# Altium PCB evacc_v3_1.PcbDoc (part 4 of 5)
Units mm, origin at the board's own origin, x right, y up, seen from the top; angles counter-clockwise.
Board outline 160 x 215 mm, 2 copper layers (Top Layer, Bottom Layer), stack 1.671 mm thick; 227 components, 143 nets, 622 pads, 320 vias.
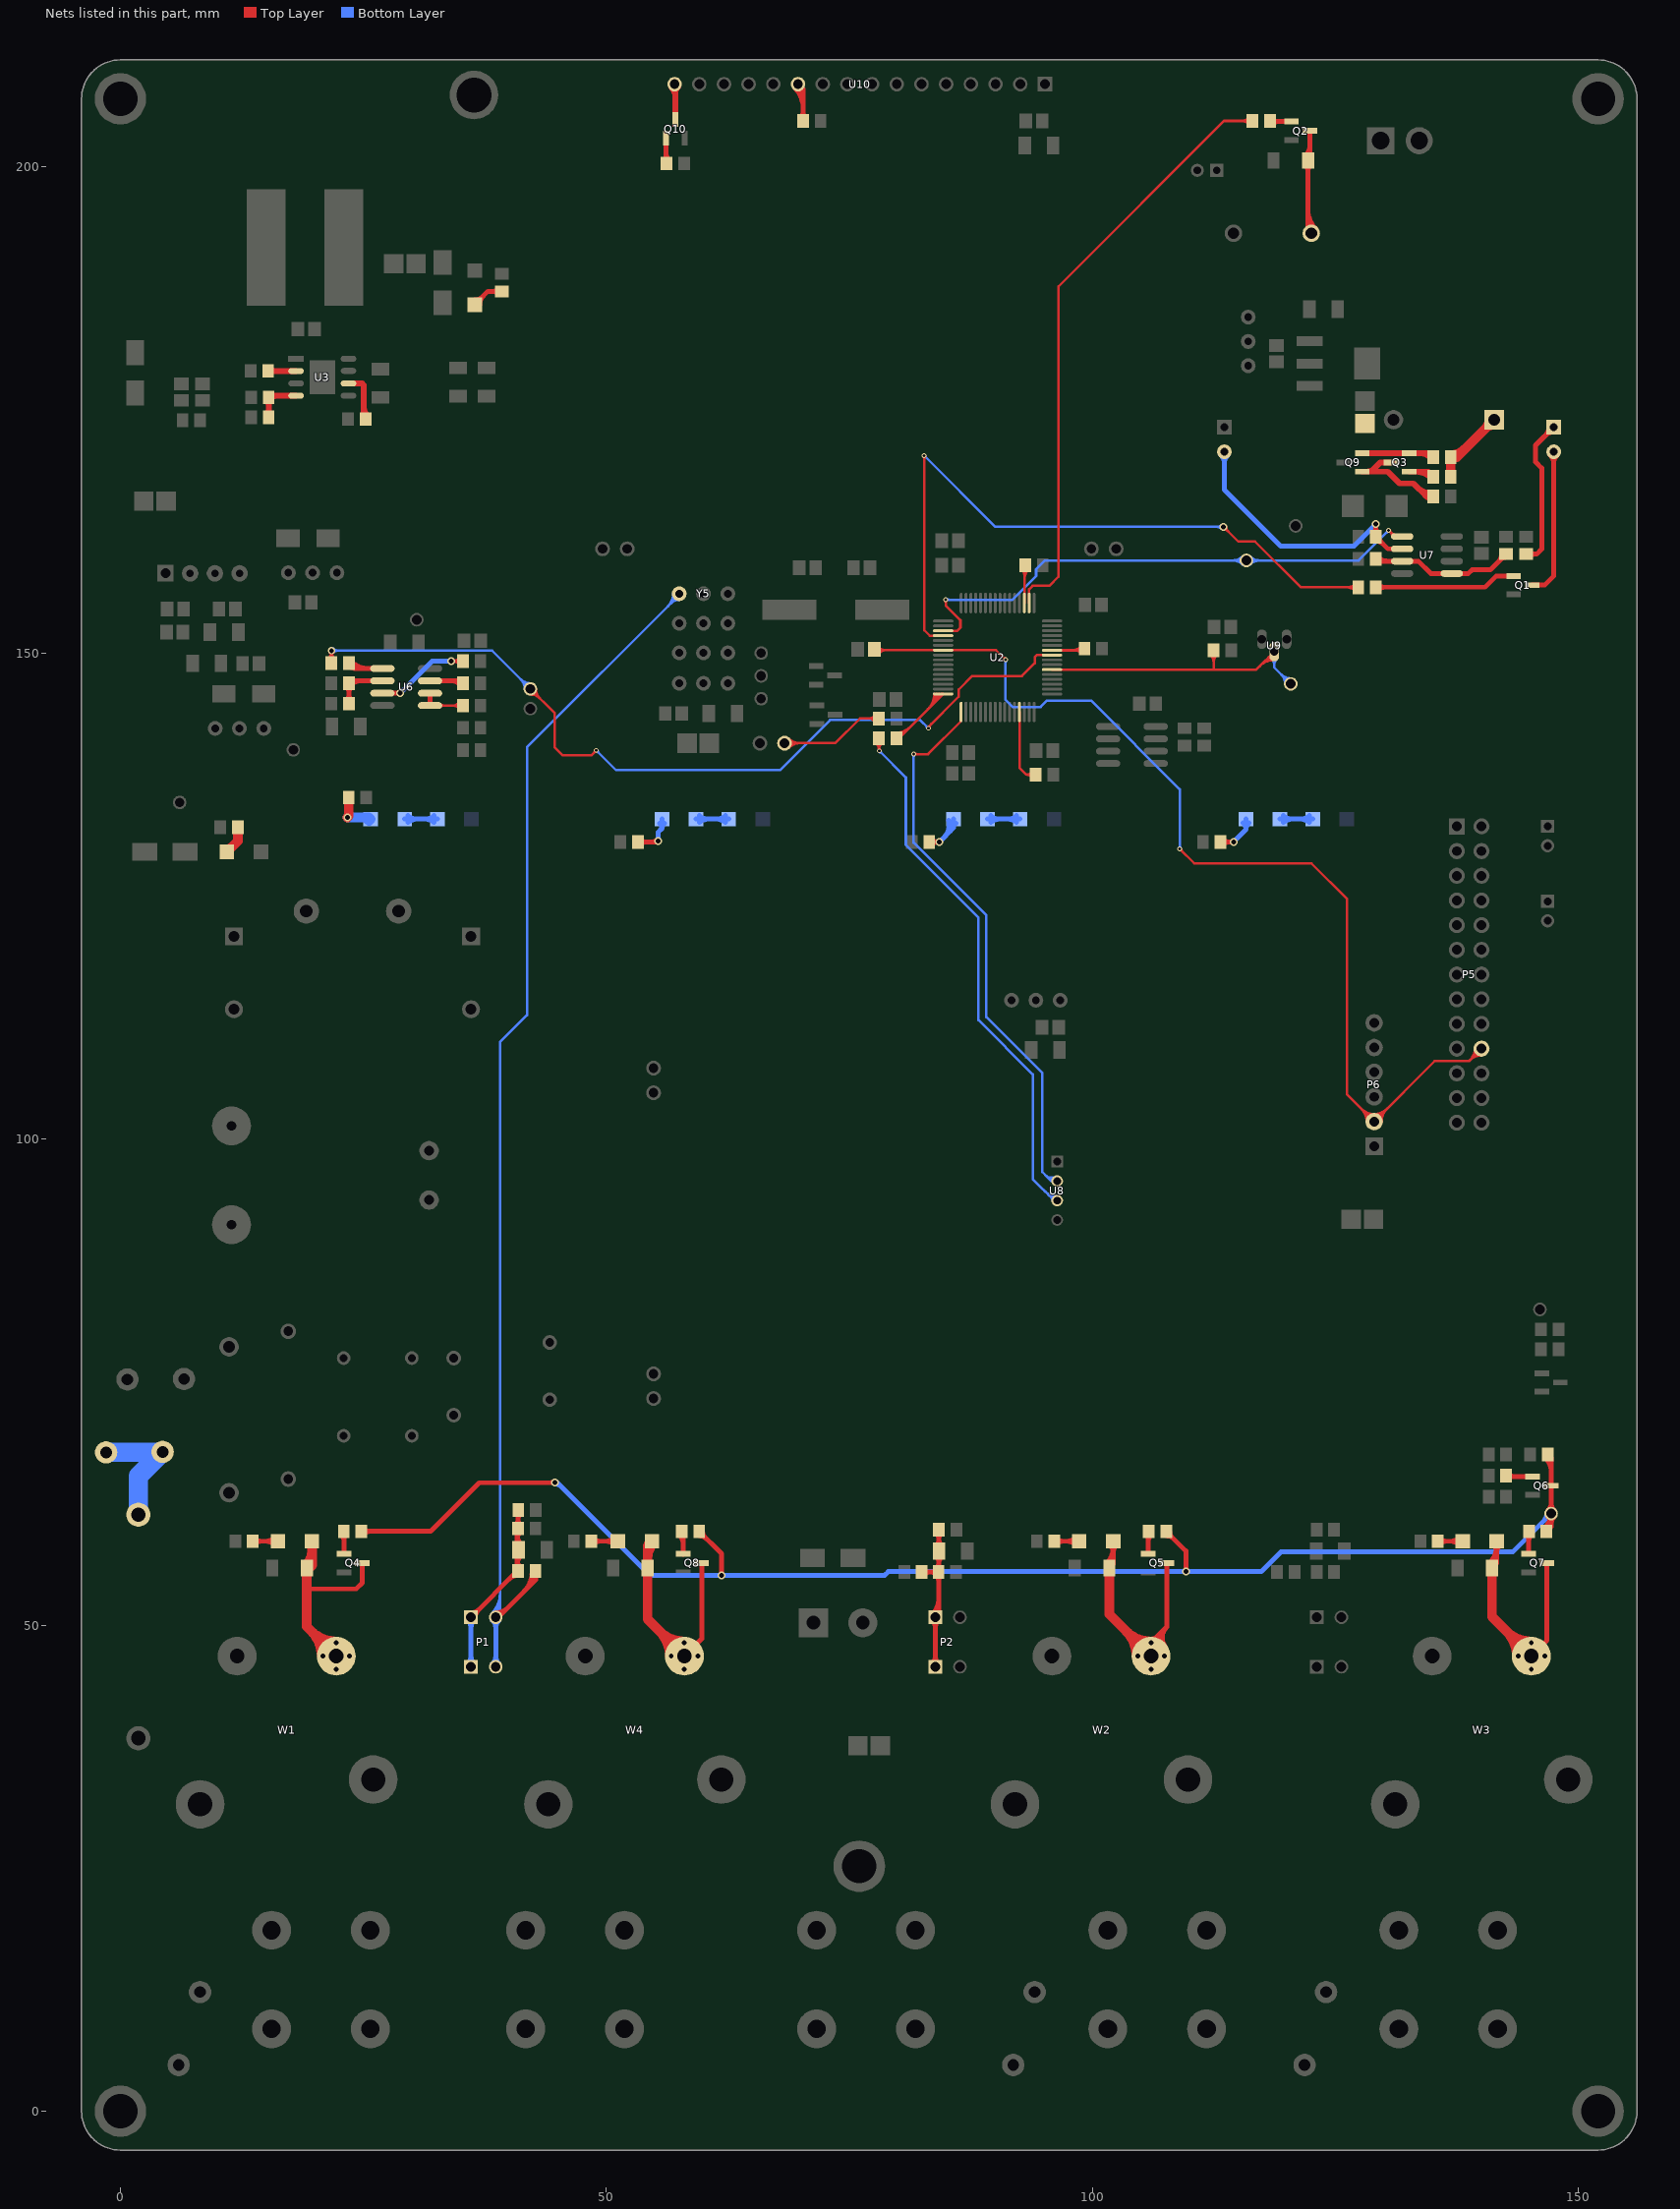
[diagram p4: the nets of this part, all layers, seen from the top]

## Via types
v1: diameter 0.8, hole 0.5, Top Layer to Bottom Layer, 150 vias
v2: diameter 0.8, hole 0.6, Top Layer to Bottom Layer, 80 vias
v3: diameter 0.5, hole 0.3, Top Layer to Bottom Layer, 53 vias
v4: diameter 1.27, hole 0.711, Top Layer to Bottom Layer, 20 vias
v5: diameter 1.2, hole 0.7, Top Layer to Bottom Layer, 13 vias
v6: diameter 1.2, hole 0.8, Top Layer to Bottom Layer, 4 vias

## Nets (pads, with @x,y where several pads share a name; then routed paths per layer and width w, separated by ;. In a path a pad name is that pad's centre, name@x,y a point inside that pad or via, vN(x,y) a via of type N, cw(c..) or ccw(c..) an arc to the next point about the centre after c; other vN are vias at no path point) (continued)
NetD6_1: D6.1 R10.1 | length 9.8
  Top Layer w0.5: D6.1@36.449,185.829 37.807,187.187 R10.1@39.243,187.187 ; 37.303,186.683 cw(c36.449,187.536) 36.449,186.329 ccw(c36.449,187.536) 37.303,186.683 ; 37.303,186.683 ccw(c38.156,185.829) 36.949,185.829 cw(c38.156,185.829) 37.303,186.683 ; 38.298,187.187 cw(c38.298,186.342) 38.896,186.94 ccw(c38.298,186.342) 38.298,187.187 ; 38.298,187.187 ccw(c38.298,188.032) 38.896,187.435 cw(c38.298,188.032) 38.298,187.187
NetD8_1: D8.1 R15.2 | length 3
  Top Layer w1: D8.1@10.95,129.54 12.076,130.666 R15.2@12.076,132.08
NetD11_1: D11.1 R34.1 | length 21.9
  Top Layer w0.5: R34.1@144.602,160.164 145.686,160.164 146.202,160.68 146.202,169.012 145.567,169.647 145.567,171.348 D11.1@147.447,173.228 ; 145.547,160.164 cw(c145.547,161.009) 144.95,160.411 ccw(c145.547,161.009) 145.547,160.164 ; 145.547,160.164 ccw(c145.547,159.319) 144.95,159.916 cw(c145.547,159.319) 145.547,160.164 ; 146.593,172.374 cw(c147.447,171.521) 147.447,172.728 ccw(c147.447,171.521) 146.593,172.374 ; 146.593,172.374 ccw(c145.74,173.228) 146.947,173.228 cw(c145.74,173.228) 146.593,172.374
NetD11_2: D11.2 Q1.3 | length 19.2
  Top Layer w0.5: Q1.3@145.222,156.972 146.507,156.972 147.447,157.912 D11.2@147.447,170.688 ; 147.447,169.481 cw(c148.654,169.481) 147.801,170.334 ccw(c148.654,169.481) 147.447,169.481 ; 147.447,169.481 ccw(c146.24,169.481) 147.093,170.334 cw(c146.24,169.481) 147.447,169.481
NetD12_2: D12.2 R35.1 U7.2 | length 37.1
  Top Layer w0.5: v1(129.134,163.246) 129.134,161.961 R35.1@129.145,161.95 130.387,160.708 U7.2@131.855,160.708 ; R35.1@128.897,162.298 ccw(c128.326,162.869) 129.134,162.869 cw(c128.326,162.869) R35.1@128.897,162.298 ; v1@129.134,162.922 ccw(c130.016,162.922) 129.392,162.298 cw(c130.016,162.922) v1@129.134,162.922 ; R35.1@129.145,161.5 cw(c129.145,160.414) 129.913,161.182 ccw(c129.145,160.414) R35.1@129.145,161.5 ; R35.1@129.495,161.85 ccw(c130.098,161.85) 129.671,161.424 cw(c130.098,161.85) R35.1@129.495,161.85
  Bottom Layer w0.5: D12.2@113.563,170.688 113.563,166.776 119.355,160.985 126.898,160.985 129.134,163.22 v1(129.134,163.246) ; 113.563,169.481 cw(c114.771,169.481) 113.917,170.334 ccw(c114.771,169.481) 113.563,169.481 ; 113.563,169.481 ccw(c112.356,169.481) 113.21,170.334 cw(c112.356,169.481) 113.563,169.481 ; 128.86,162.946 ccw(c128.56,163.246) 128.984,163.246 cw(c128.56,163.246) 128.86,162.946
NetD13_1: D13.1 DS1.2 Q2.3 | length 17.9
  Top Layer w0.5: D13.1@121.906,200.17 cw(c121.266,199.53) 122.171,199.53 cw(c123.076,199.53) D13.1@122.436,200.17 ; 122.171,194.328 ccw(c123.663,194.328) DS1.2@122.608,193.273 ; 122.171,195.535 ccw(c124.87,195.535) DS1.2@122.962,193.627 ; Q2.3@122.362,203.708 122.362,200.851 D13.1@122.171,200.66 122.171,193.498 DS1.2@122.502,193.167 ; D13.1@121.906,201.15 ccw(c120.805,202.251) 122.362,202.251 cw(c120.805,202.251) D13.1@121.906,201.15
NetD14_1: D14.1 D15.2 | length 10.9
  Bottom Layer w0.5: D15.2@119.289,132.906 D14.1@122.647,132.906 ; 120.496,132.906 cw(c120.496,134.113) 119.643,133.26 ccw(c120.496,134.113) 120.496,132.906 ; 120.496,132.906 ccw(c120.496,131.699) 119.643,132.552 cw(c120.496,131.699) 120.496,132.906 ; 121.44,132.906 cw(c121.44,131.699) 122.293,132.552 ccw(c121.44,131.699) 121.44,132.906 ; 121.44,132.906 ccw(c121.44,134.113) 122.293,133.26 cw(c121.44,134.113) 121.44,132.906
NetD15_1: D15.1 R41.2 | length 10
  Top Layer w0.5: R41.2@113.168,130.556 v1(114.503,130.556) ; 114.013,130.556 cw(c114.013,131.401) 113.416,130.803 ccw(c114.013,131.401) 114.013,130.556 ; 114.013,130.556 ccw(c114.013,129.711) 113.416,130.309 cw(c114.013,129.711) 114.013,130.556
  Bottom Layer w0.5: v1(114.503,130.556) 115.789,131.842 ; D15.1@115.789,132.906 115.789,131.842 ; 115.789,131.842 cw(c116.671,131.842) 116.108,132.521 ccw(c116.671,131.842) 115.789,131.842 ; 115.789,131.842 ccw(c114.907,131.842) 115.47,132.521 cw(c114.907,131.842) 115.789,131.842
NetD16_1: D16.1 D17.2 | length 10.9
  Bottom Layer w0.5: D17.2@89.19,132.906 D16.1@92.548,132.906 ; 90.397,132.906 cw(c90.397,134.113) 89.544,133.26 ccw(c90.397,134.113) 90.397,132.906 ; 90.397,132.906 ccw(c90.397,131.699) 89.544,132.552 cw(c90.397,131.699) 90.397,132.906 ; 91.341,132.906 cw(c91.341,131.699) 92.194,132.552 ccw(c91.341,131.699) 91.341,132.906 ; 91.341,132.906 ccw(c91.341,134.113) 92.194,133.26 cw(c91.341,134.113) 91.341,132.906
NetD17_1: D17.1 R42.2 | length 15.6
  Top Layer w0.5: R42.2@83.196,130.556 v1(84.252,130.556) ; v1@84.041,130.556 cw(c84.041,131.401) 83.444,130.803 ccw(c84.041,131.401) v1@84.041,130.556 ; v1@84.041,130.556 ccw(c84.041,129.711) 83.444,130.309 cw(c84.041,129.711) v1@84.041,130.556
  Bottom Layer w0.5: v1(84.252,130.556) 85.69,131.994 ; 85.69,131.994 cw(c86.271,131.994) 85.959,132.484 ccw(c86.271,131.994) 85.69,131.994 ; 85.69,131.994 ccw(c85.109,131.994) 85.421,132.484 cw(c85.109,131.994) 85.69,131.994 ; 85.69,131.994 D17.1@85.69,132.906 ; D17.1@85.69,132.906 cw(c84.388,132.588) 85.336,131.64 ccw(c84.388,132.588) D17.1@85.69,132.906 ; 84.708,131.012 ccw(c83.379,132.341) 85.204,132.787 cw(c83.379,132.341) 84.708,131.012
NetD18_1: D18.1 D19.2 | length 10.9
  Bottom Layer w0.5: D19.2@59.218,132.906 D18.1@62.576,132.906 ; 60.425,132.906 cw(c60.425,134.113) 59.572,133.26 ccw(c60.425,134.113) 60.425,132.906 ; 60.425,132.906 ccw(c60.425,131.699) 59.572,132.552 cw(c60.425,131.699) 60.425,132.906 ; 61.369,132.906 cw(c61.369,131.699) 62.222,132.552 ccw(c61.369,131.699) 61.369,132.906 ; 61.369,132.906 ccw(c61.369,134.113) 62.222,133.26 cw(c61.369,134.113) 61.369,132.906
NetD19_1: D19.1 R43.2 | length 10.8
  Top Layer w0.5: R43.2@53.224,130.556 55.194,130.556 v1(55.296,130.658) ; 54.069,130.556 cw(c54.069,131.401) 53.472,130.803 ccw(c54.069,131.401) 54.069,130.556 ; 54.069,130.556 ccw(c54.069,129.711) 53.472,130.309 cw(c54.069,129.711) 54.069,130.556 ; 54.688,130.556 ccw(c54.688,131.265) 55.19,130.764 cw(c54.688,131.265) 54.688,130.556
  Bottom Layer w0.5: v1(55.296,130.658) 55.296,131.547 55.718,131.969 ; D19.1@55.718,132.906 55.718,131.969 ; 55.718,131.969 cw(c56.346,131.969) 55.996,132.491 ccw(c56.346,131.969) 55.718,131.969 ; 55.718,131.969 ccw(c55.09,131.969) 55.44,132.491 cw(c55.09,131.969) 55.718,131.969
NetD20_1: D20.1 D21.2 | length 10.9
  Bottom Layer w0.5: D21.2@29.246,132.906 D20.1@32.604,132.906 ; 30.453,132.906 cw(c30.453,134.113) 29.6,133.26 ccw(c30.453,134.113) 30.453,132.906 ; 30.453,132.906 ccw(c30.453,131.699) 29.6,132.552 cw(c30.453,131.699) 30.453,132.906 ; 31.397,132.906 cw(c31.397,131.699) 32.25,132.552 ccw(c31.397,131.699) 31.397,132.906 ; 31.397,132.906 ccw(c31.397,134.113) 32.25,133.26 cw(c31.397,134.113) 31.397,132.906
NetD21_1: D21.1 R44.2 | length 6.5
  Top Layer w1: v1(23.368,133.096) 23.484,133.212 R44.2@23.484,135.128
  Bottom Layer w1: v1(23.368,133.096) 25.556,133.096 D21.1@25.746,132.906 ; 24.684,133.096 cw(c24.684,131.844) 25.569,132.729 ccw(c24.684,131.844) 24.684,133.096
NetD23_1: D23.1 D25.2 Q4.3 W1.2 | length 57.4
  Top Layer w0.254: D23.1@19.174,55.88 19.174,56.999 ; D25.2@19.701,58.371 D25.2@19.701,58.625 19.701,57.526 ; v1(22.202,45.453) W1.2@22.202,46.814 v1(22.202,48.196) ; 19.174,56.999 cw(c18.62,56.999) 18.912,56.528 ccw(c18.62,56.999) 19.174,56.999 ; 19.174,56.999 ccw(c19.728,56.999) 19.436,56.528 cw(c19.728,56.999) 19.174,56.999 ; 19.174,56.999 19.701,57.526 ; 19.701,57.527 cw(c20.358,57.527) 20.021,58.09 ccw(c20.358,57.527) 19.701,57.527 ; 19.701,57.527 ccw(c19.044,57.527) 19.381,58.09 cw(c19.044,57.527) 19.701,57.527 ; W1.2@22.202,46.112 cw(c21.543,46.112) 22.009,45.646 ccw(c21.543,46.112) W1.2@22.202,46.112 ; W1.2@22.202,46.112 ccw(c22.861,46.112) 22.395,45.646 cw(c22.861,46.112) W1.2@22.202,46.112 ; W1.2@22.202,47.537 cw(c22.861,47.537) 22.395,48.003 ccw(c22.861,47.537) W1.2@22.202,47.537 ; W1.2@22.202,47.537 ccw(c21.543,47.537) 22.009,48.003 cw(c21.543,47.537) W1.2@22.202,47.537
  Top Layer w0.5: 19.174,53.848 19.301,53.721 24.257,53.721 24.892,54.356 Q4.3@24.892,56.388
  Top Layer w1: D25.2@19.701,58.371 19.701,57.526 ; W1.2@22.202,46.814 21.522,47.494 21.511,47.505 19.174,49.842 19.174,53.848 19.174,55.626 19.301,55.753 19.701,56.153 19.701,57.526 ; 19.641,49.375 cw(c17.081,46.814) 20.702,46.814 ccw(c17.081,46.814) 19.641,49.375 ; 19.641,49.375 ccw(c22.202,51.935) 22.202,48.314 cw(c22.202,51.935) 19.641,49.375 ; 19.701,57.526 cw(c17.951,57.526) 19.092,56.2 ccw(c17.951,57.526) 19.701,57.526
  Bottom Layer w0.254: v1(20.841,46.814) W1.2@22.202,46.814 v1(23.584,46.814) ; W1.2@21.5,46.814 cw(c21.5,47.473) 21.034,47.007 ccw(c21.5,47.473) W1.2@21.5,46.814 ; W1.2@21.5,46.814 ccw(c21.5,46.155) 21.034,46.621 cw(c21.5,46.155) W1.2@21.5,46.814 ; W1.2@22.925,46.814 cw(c22.925,46.155) 23.391,46.621 ccw(c22.925,46.155) W1.2@22.925,46.814 ; W1.2@22.925,46.814 ccw(c22.925,47.473) 23.391,47.007 cw(c22.925,47.473) W1.2@22.925,46.814
NetD24_1: D24.1 D26.2 Q5.3 W2.2 | length 68.2
  Top Layer w0.254: v1(106.022,45.453) W2.2@106.022,46.814 ; W2.2@106.022,46.112 cw(c105.363,46.112) 105.829,45.646 ccw(c105.363,46.112) W2.2@106.022,46.112 ; W2.2@106.022,46.112 ccw(c106.681,46.112) 106.215,45.646 cw(c106.681,46.112) W2.2@106.022,46.112
  Top Layer w0.5: D24.1@101.724,55.88 102.124,56.28 D26.2@102.124,58.625 ; W2.2@106.022,46.814 v1(106.022,48.196) 107.63,49.804 ; Q5.3@107.63,56.388 107.63,49.804 ; 102.124,57.418 cw(c103.331,57.418) 102.478,58.271 ccw(c103.331,57.418) 102.124,57.418 ; 102.124,57.418 ccw(c100.917,57.418) 101.771,58.271 cw(c100.917,57.418) 102.124,57.418 ; 107.63,49.804 ccw(c108.727,48.707) 107.456,47.817 cw(c108.727,48.707) 107.63,49.804 ; D24.1@101.459,56.37 ccw(c99.853,57.976) 102.124,57.976 cw(c99.853,57.976) D24.1@101.459,56.37 ; D24.1@101.812,56.017 ccw(c101.06,56.769) 102.124,56.769 cw(c101.06,56.769) D24.1@101.812,56.017 ; W2.2@106.022,48.564 ccw(c106.022,49.451) 106.649,48.824 cw(c106.022,49.451) W2.2@106.022,48.564 ; W2.2@106.636,47.244 cw(c107.735,48.013) 106.787,48.961 ccw(c107.735,48.013) W2.2@106.636,47.244 ; W2.2@107.046,47.531 cw(c108.231,48.36) 107.208,49.383 ccw(c108.231,48.36) W2.2@107.046,47.531
  Top Layer w1: D24.1@101.724,55.88 101.724,51.112 105.331,47.505 105.342,47.494 W2.2@106.022,46.814 ; 103.461,49.375 cw(c100.901,46.814) 104.522,46.814 ccw(c100.901,46.814) 103.461,49.375 ; 103.461,49.375 ccw(c106.022,51.935) 106.022,48.314 cw(c106.022,51.935) 103.461,49.375
  Bottom Layer w0.254: v1(104.661,46.814) W2.2@106.022,46.814 v1(107.404,46.814) ; W2.2@105.32,46.814 cw(c105.32,47.473) 104.854,47.007 ccw(c105.32,47.473) W2.2@105.32,46.814 ; W2.2@105.32,46.814 ccw(c105.32,46.155) 104.854,46.621 cw(c105.32,46.155) W2.2@105.32,46.814 ; W2.2@106.745,46.814 cw(c106.745,46.155) 107.211,46.621 ccw(c106.745,46.155) W2.2@106.745,46.814 ; W2.2@106.745,46.814 ccw(c106.745,47.473) 107.211,47.007 cw(c106.745,47.473) W2.2@106.745,46.814
NetD25_1: D25.1 R47.1 | length 9
  Top Layer w0.5: R47.1@13.619,58.625 D25.1@16.201,58.625 ; 14.464,58.625 cw(c14.464,59.47) 13.866,58.872 ccw(c14.464,59.47) 14.464,58.625 ; 14.464,58.625 ccw(c14.464,57.78) 13.866,58.377 cw(c14.464,57.78) 14.464,58.625 ; 14.994,58.625 cw(c14.994,57.418) 15.848,58.271 ccw(c14.994,57.418) 14.994,58.625 ; 14.994,58.625 ccw(c14.994,59.832) 15.848,58.979 cw(c14.994,59.832) 14.994,58.625
NetD26_1: D26.1 R49.1 | length 9
  Top Layer w0.5: R49.1@96.067,58.625 D26.1@98.624,58.625 ; 96.912,58.625 cw(c96.912,59.47) 96.315,58.872 ccw(c96.912,59.47) 96.912,58.625 ; 96.912,58.625 ccw(c96.912,57.78) 96.315,58.377 cw(c96.912,57.78) 96.912,58.625 ; 97.417,58.625 cw(c97.417,57.418) 98.271,58.271 ccw(c97.417,57.418) 97.417,58.625 ; 97.417,58.625 ccw(c97.417,59.832) 98.271,58.979 cw(c97.417,59.832) 97.417,58.625
NetD27_1: D27.1 D29.2 Q7.3 W3.2 | length 59
  Top Layer w0.254: v1(145.138,45.453) W3.2@145.138,46.814 v1(145.138,48.196) ; W3.2@145.138,46.112 cw(c144.479,46.112) 144.945,45.646 ccw(c144.479,46.112) W3.2@145.138,46.112 ; W3.2@145.138,46.112 ccw(c145.797,46.112) 145.331,45.646 cw(c145.797,46.112) W3.2@145.138,46.112 ; W3.2@145.138,47.537 cw(c145.797,47.537) 145.331,48.003 ccw(c145.797,47.537) W3.2@145.138,47.537 ; W3.2@145.138,47.537 ccw(c144.479,47.537) 144.945,48.003 cw(c144.479,47.537) W3.2@145.138,47.537
  Top Layer w0.5: D27.1@141.094,55.88 141.577,56.363 D29.2@141.577,58.625 ; W3.2@145.138,46.814 146.746,48.422 Q7.3@146.746,56.388 ; 141.577,57.418 cw(c142.784,57.418) 141.931,58.271 ccw(c142.784,57.418) 141.577,57.418 ; 141.577,57.418 ccw(c140.37,57.418) 141.223,58.271 cw(c140.37,57.418) 141.577,57.418 ; D27.1@140.829,56.37 ccw(c139.023,58.176) 141.577,58.176 cw(c139.023,58.176) D27.1@140.829,56.37 ; D27.1@141.182,56.017 ccw(c140.23,56.969) 141.577,56.969 cw(c140.23,56.969) D27.1@141.182,56.017
  Top Layer w1: D27.1@141.094,55.88 141.094,50.858 144.447,47.505 144.458,47.494 W3.2@145.138,46.814 ; 142.577,49.375 cw(c140.017,46.814) 143.638,46.814 ccw(c140.017,46.814) 142.577,49.375 ; 142.577,49.375 ccw(c145.138,51.935) 145.138,48.314 cw(c145.138,51.935) 142.577,49.375
  Bottom Layer w0.254: v1(143.777,46.814) W3.2@145.138,46.814 v1(146.52,46.814) ; W3.2@144.436,46.814 cw(c144.436,47.473) 143.97,47.007 ccw(c144.436,47.473) W3.2@144.436,46.814 ; W3.2@144.436,46.814 ccw(c144.436,46.155) 143.97,46.621 cw(c144.436,46.155) W3.2@144.436,46.814 ; W3.2@145.861,46.814 cw(c145.861,46.155) 146.327,46.621 ccw(c145.861,46.155) W3.2@145.861,46.814 ; W3.2@145.861,46.814 ccw(c145.861,47.473) 146.327,47.007 cw(c145.861,47.473) W3.2@145.861,46.814
NetD28_1: D28.1 D30.2 Q8.3 W4.2 | length 52.4
  Top Layer w0.254: v1(58.016,45.453) W4.2@58.016,46.814 v1(58.016,48.196) ; W4.2@58.016,46.112 cw(c57.357,46.112) 57.823,45.646 ccw(c57.357,46.112) W4.2@58.016,46.112 ; W4.2@58.016,46.112 ccw(c58.675,46.112) 58.209,45.646 cw(c58.675,46.112) W4.2@58.016,46.112 ; W4.2@58.016,47.537 cw(c58.675,47.537) 58.209,48.003 ccw(c58.675,47.537) W4.2@58.016,47.537 ; W4.2@58.016,47.537 ccw(c57.357,47.537) 57.823,48.003 cw(c57.357,47.537) W4.2@58.016,47.537
  Top Layer w0.5: W4.2@58.016,46.814 59.795,48.593 Q8.3@59.795,56.388
  Top Layer w1: D30.2@54.677,58.625 54.226,58.174 D28.1@54.226,55.88 54.226,50.604 57.325,47.505 57.336,47.494 W4.2@58.016,46.814 ; 55.455,49.375 cw(c52.895,46.814) 56.516,46.814 ccw(c52.895,46.814) 55.455,49.375 ; 55.455,49.375 ccw(c58.016,51.935) 58.016,48.314 cw(c58.016,51.935) 55.455,49.375 ; 54.226,56.933 cw(c56.369,56.933) 54.854,58.448 ccw(c56.369,56.933) 54.226,56.933
  Bottom Layer w0.254: v1(56.655,46.814) W4.2@58.016,46.814 v1(59.398,46.814) ; W4.2@57.314,46.814 cw(c57.314,47.473) 56.848,47.007 ccw(c57.314,47.473) W4.2@57.314,46.814 ; W4.2@57.314,46.814 ccw(c57.314,46.155) 56.848,46.621 cw(c57.314,46.155) W4.2@57.314,46.814 ; W4.2@58.739,46.814 cw(c58.739,46.155) 59.205,46.621 ccw(c58.739,46.155) W4.2@58.739,46.814 ; W4.2@58.739,46.814 ccw(c58.739,47.473) 59.205,47.007 cw(c58.739,47.473) W4.2@58.739,46.814
NetD29_1: D29.1 R57.1 | length 9
  Top Layer w0.5: R57.1@135.52,58.625 D29.1@138.077,58.625 ; 136.365,58.625 cw(c136.365,59.47) 135.768,58.872 ccw(c136.365,59.47) 136.365,58.625 ; 136.365,58.625 ccw(c136.365,57.78) 135.768,58.377 cw(c136.365,57.78) 136.365,58.625 ; 136.87,58.625 cw(c136.87,57.418) 137.723,58.271 ccw(c136.87,57.418) 136.87,58.625 ; 136.87,58.625 ccw(c136.87,59.832) 137.723,58.979 cw(c136.87,59.832) 136.87,58.625
NetD30_1: D30.1 R58.1 | length 9.2
  Top Layer w0.5: R58.1@48.442,58.625 D30.1@51.177,58.625 ; 49.287,58.625 cw(c49.287,59.47) 48.69,58.872 ccw(c49.287,59.47) 49.287,58.625 ; 49.287,58.625 ccw(c49.287,57.78) 48.69,58.377 cw(c49.287,57.78) 49.287,58.625 ; 49.97,58.625 cw(c49.97,57.418) 50.823,58.271 ccw(c49.97,57.418) 49.97,58.625 ; 49.97,58.625 ccw(c49.97,59.832) 50.823,58.979 cw(c49.97,59.832) 49.97,58.625
NetD32_2: D32.2 R61.1 R63.2 | length 15.1
  Top Layer w1: R63.2@136.841,168.123 R61.1@136.841,170.155 137.489,170.155 D32.2@141.324,173.99 ; D32.2@140.47,173.136 cw(c141.324,172.283) 141.324,173.49 ccw(c141.324,172.283) D32.2@140.47,173.136 ; D32.2@140.47,173.136 ccw(c139.617,173.99) 140.824,173.99 cw(c139.617,173.99) D32.2@140.47,173.136 ; R61.1@136.841,170.355 ccw(c136.841,172.401) 138.288,170.954 cw(c136.841,172.401) R61.1@136.841,170.355
NetF1_2: F1.2 N1.1 RV4.1 | length 13.2
  Bottom Layer w2: N1.1@-1.473,67.767 4.293,67.767 1.842,65.317 F1.2@1.842,61.362
NetIR_PULSE_1: IR_PULSE.1 U2.3 U7.1 | length 74.9
  Top Layer w0.254: U2.3@84.634,152.282 86.09,152.282 86.411,152.603 86.411,153.355 84.9,154.866 v3(84.9,155.475) ; v3(130.468,162.613) 131.102,161.978 U7.1@131.855,161.978 ; 84.9,155.178 cw(c85.197,155.178) 84.987,155.388 ccw(c85.197,155.178) 84.9,155.178 ; 84.9,155.178 ccw(c84.603,155.178) 84.813,155.388 cw(c84.603,155.178) 84.9,155.178 ; 130.678,162.403 cw(c130.888,162.613) 130.591,162.613 ccw(c130.888,162.613) 130.678,162.403 ; 130.678,162.403 ccw(c130.468,162.193) 130.468,162.49 cw(c130.468,162.193) 130.678,162.403 ; v3@130.64,162.44 cw(c130.179,161.978) 130.832,161.978 ccw(c130.179,161.978) v3@130.64,162.44 ; 130.755,162.325 ccw(c131.055,162.625) 131.055,162.201 cw(c131.055,162.625) 130.755,162.325
  Bottom Layer w0.254: v3(84.9,155.475) 91.758,155.475 94.196,157.914 94.196,158.599 95.109,159.512 IR_PULSE.1@115.824,159.512 127.367,159.512 v3(130.468,162.613) ; 85.197,155.475 cw(c85.197,155.772) 84.987,155.562 ccw(c85.197,155.772) 85.197,155.475 ; 85.197,155.475 ccw(c85.197,155.178) 84.987,155.388 cw(c85.197,155.178) 85.197,155.475 ; 114.441,159.512 cw(c114.441,158.129) 115.419,159.107 ccw(c114.441,158.129) 114.441,159.512 ; 114.441,159.512 ccw(c114.441,160.895) 115.419,159.917 cw(c114.441,160.895) 114.441,159.512 ; 115.054,159.512 cw(c115.054,158.742) 115.598,159.286 ccw(c115.054,158.742) 115.054,159.512 ; 115.054,159.512 ccw(c115.054,160.282) 115.598,159.738 cw(c115.054,160.282) 115.054,159.512 ; 116.594,159.512 cw(c116.594,160.282) 116.05,159.738 ccw(c116.594,160.282) 116.594,159.512 ; 116.594,159.512 ccw(c116.594,158.742) 116.05,159.286 cw(c116.594,158.742) 116.594,159.512 ; 117.207,159.512 cw(c117.207,160.895) 116.229,159.917 ccw(c117.207,160.895) 117.207,159.512 ; 117.207,159.512 ccw(c117.207,158.129) 116.229,159.107 cw(c117.207,158.129) 117.207,159.512 ; 130.258,162.403 cw(c130.468,162.193) 130.468,162.49 ccw(c130.468,162.193) 130.258,162.403 ; 130.258,162.403 ccw(c130.048,162.613) 130.345,162.613 cw(c130.048,162.613) 130.258,162.403
NetJ1_1: J1.1 R3.2 | length 22.1
  Top Layer w0.254: J1.1@68.326,140.716 73.533,140.716 76.073,143.256 R3.2@78.031,143.256 ; 69.246,140.716 cw(c69.246,141.636) 68.595,140.985 ccw(c69.246,141.636) 69.246,140.716 ; 69.246,140.716 ccw(c69.246,139.796) 68.595,140.447 cw(c69.246,139.796) 69.246,140.716 ; 69.859,140.716 cw(c69.859,142.249) 68.775,141.165 ccw(c69.859,142.249) 69.859,140.716 ; 69.859,140.716 ccw(c69.859,139.183) 68.775,140.267 cw(c69.859,139.183) 69.859,140.716 ; 76.889,143.256 cw(c76.889,142.114) 77.697,142.922 ccw(c76.889,142.114) 76.889,143.256 ; 76.889,143.256 ccw(c76.889,144.398) 77.697,143.59 cw(c76.889,144.398) 76.889,143.256
NetJ3_2: J3.2 Q3.2 Q9.2 R61.2 | length 10.2
  Top Layer w0.6: Q9.2@127.747,170.546 Q3.2@132.573,170.546 134.65,170.546 R61.2@135.041,170.155 ; 133.613,170.546 cw(c133.613,168.827) 134.829,170.042 ccw(c133.613,168.827) 133.613,170.546
NetPWM_1: PWM.1 R31.1 U2.41 | length 114.5
  Top Layer w0.254: R31.1@21.706,148.971 21.717,148.982 v1(21.717,150.241) ; PWM.1@42.164,146.304 44.692,143.776 44.692,140.271 45.466,139.497 48.475,139.497 v3(48.959,139.981) ; v3(83.11,142.255) 83.11,142.393 86.233,145.517 86.233,146.228 87.63,147.625 92.735,147.625 94.056,148.946 94.056,149.581 94.258,149.782 U2.41@95.834,149.782 ; R31.1@21.717,149.582 cw(c22.376,149.582) 21.91,150.048 ccw(c22.376,149.582) R31.1@21.717,149.582 ; R31.1@21.717,149.582 ccw(c21.058,149.582) 21.524,150.048 cw(c21.058,149.582) R31.1@21.717,149.582 ; 42.709,145.759 cw(c43.253,146.304) 42.483,146.304 ccw(c43.253,146.304) 42.709,145.759 ; 42.709,145.759 ccw(c42.164,145.215) 42.164,145.985 cw(c42.164,145.215) 42.709,145.759 ; 43.142,145.326 cw(c44.12,146.304) 42.737,146.304 ccw(c44.12,146.304) 43.142,145.326 ; 43.142,145.326 ccw(c42.164,144.348) 42.164,145.731 cw(c42.164,144.348) 43.142,145.326 ; 48.749,139.771 cw(c48.959,139.561) 48.959,139.858 ccw(c48.959,139.561) 48.749,139.771 ; 48.749,139.771 ccw(c48.539,139.981) 48.836,139.981 cw(c48.539,139.981) 48.749,139.771 ; R31.1@21.372,149.405 ccw(c20.537,150.24) v1(21.717,150.241) cw(c20.537,150.24) R31.1@21.372,149.405 ; v1@21.717,150.186 ccw(c22.821,150.186) 22.04,149.405 cw(c22.821,150.186) v1@21.717,150.186 ; v3@83.233,142.255 cw(c83.864,142.255) 83.418,142.701 ccw(c83.864,142.255) v3@83.233,142.255
  Bottom Layer w0.254: v1(21.717,150.241) 38.227,150.241 PWM.1@42.164,146.304 ; v3(48.959,139.981) 50.993,137.947 67.843,137.947 73,143.104 82.261,143.104 v3(83.11,142.255) ; 22.376,150.241 cw(c22.376,150.9) 21.91,150.434 ccw(c22.376,150.9) 22.376,150.241 ; 22.376,150.241 ccw(c22.376,149.582) 21.91,150.048 cw(c22.376,149.582) 22.376,150.241 ; 41.186,147.282 cw(c40.208,146.304) 41.591,146.304 ccw(c40.208,146.304) 41.186,147.282 ; 41.186,147.282 ccw(c42.164,148.26) 42.164,146.877 cw(c42.164,148.26) 41.186,147.282 ; 41.619,146.849 cw(c41.075,146.304) 41.845,146.304 ccw(c41.075,146.304) 41.619,146.849 ; 41.619,146.849 ccw(c42.164,147.393) 42.164,146.623 cw(c42.164,147.393) 41.619,146.849 ; 49.169,139.771 cw(c49.379,139.981) 49.082,139.981 ccw(c49.379,139.981) 49.169,139.771 ; 49.169,139.771 ccw(c48.959,139.561) 48.959,139.858 cw(c48.959,139.561) 49.169,139.771 ; 82.9,142.465 cw(c82.69,142.255) 82.987,142.255 ccw(c82.69,142.255) 82.9,142.465 ; 82.9,142.465 ccw(c83.11,142.675) 83.11,142.378 cw(c83.11,142.675) 82.9,142.465
NetQ1_1: Q1.1 R36.2 | length 17.3
  Top Layer w0.5: R36.2@129.145,156.743 129.21,156.769 140.386,156.769 141.539,157.922 Q1.1@143.322,157.922 ; R36.2@129.392,156.496 cw(c130.051,155.837) 130.051,156.769 ccw(c130.051,155.837) R36.2@129.392,156.496 ; R36.2@129.392,156.991 ccw(c129.928,157.527) 129.928,156.769 cw(c129.928,157.527) R36.2@129.392,156.991
NetQ2_1: Q2.1 R40.1 | length 4.9
  Top Layer w0.5: R40.1@118.248,204.724 118.314,204.658 Q2.1@120.462,204.658 ; R40.1@118.495,204.377 cw(c119.175,203.697) 119.175,204.658 ccw(c119.175,203.697) R40.1@118.495,204.377 ; R40.1@118.495,204.871 ccw(c119.011,205.387) 119.011,204.658 cw(c119.011,205.387) R40.1@118.495,204.871
NetQ3_1: Q3.1 R63.1 | length 6.1
  Top Layer w0.6: Q3.1@132.573,168.646 134.518,168.646 R63.1@135.041,168.123 ; Q3.1@133.295,168.646 cw(c133.295,166.477) 134.829,168.01 ccw(c133.295,166.477) Q3.1@133.295,168.646
NetQ3_3: Q3.3 Q9.1 R62.2 | length 20
  Top Layer w0.6: Q9.1@127.747,168.646 128.666,168.646 ; Q3.3@130.673,169.596 129.616,169.596 128.666,168.646 ; R62.2@135.041,166.091 134.341,166.091 ; 128.666,168.646 130.363,168.646 131.572,167.437 132.994,167.437 134.341,166.091 ; 134.341,166.091 cw(c134.341,165.424) 134.824,165.884 ccw(c134.341,165.424) 134.341,166.091 ; 134.341,166.091 ccw(c134.341,166.758) 134.824,166.298 cw(c134.341,166.758) 134.341,166.091 ; Q9.1@128.197,168.646 ccw(c128.197,169.779) 128.998,168.978 cw(c128.197,169.779) Q9.1@128.197,168.646 ; 133.395,167.037 ccw(c134.757,168.399) 135.003,166.488 cw(c134.757,168.399) 133.395,167.037 ; 134.258,166.173 ccw(c134.954,166.869) 135.079,165.893 cw(c134.954,166.869) 134.258,166.173
NetQ4_1: Q4.1 R51.1 | length 5
  Top Layer w0.254: R51.1@22.976,59.436 R51.1@22.976,59.641
  Top Layer w0.5: R51.1@22.976,59.436 22.992,59.42 Q4.1@22.992,57.338 ; R51.1@22.729,59.293 cw(c22.093,58.657) 22.992,58.657 ccw(c22.093,58.657) R51.1@22.729,59.293 ; 22.992,58.735 cw(c23.782,58.735) 23.224,59.293 ccw(c23.782,58.735) 22.992,58.735
NetQ5_1: Q5.1 R52.1 | length 5
  Top Layer w0.5: Q5.1@105.73,57.338 105.73,59.591 R52.1@105.78,59.641 ; R52.1@105.533,59.293 cw(c105.056,58.817) 105.73,58.817 ccw(c105.056,58.817) R52.1@105.533,59.293 ; 105.73,58.575 cw(c106.746,58.575) 106.028,59.293 ccw(c106.746,58.575) 105.73,58.575
NetQ6_1: Q6.1 R55.2 | length 5.4
  Top Layer w0.5: R55.2@142.549,65.389 142.648,65.29 Q6.1@145.271,65.29 ; R55.2@142.797,65.041 cw(c143.397,64.44) 143.397,65.29 ccw(c143.397,64.44) R55.2@142.797,65.041 ; R55.2@142.797,65.536 ccw(c143.391,66.13) 143.391,65.29 cw(c143.391,66.13) R55.2@142.797,65.536
NetQ6_3: Q6.3 R51.2 R52.2 R53.2 R59.2 R60.2 RLY.1 | length 178.5
  Top Layer w0.5: R51.2@24.776,59.641 31.904,59.641 36.906,64.643 v1@44.704,64.643 ; R60.2@59.542,59.641 61.849,57.334 v1(61.849,55.118) ; R52.2@107.58,59.641 109.601,57.62 v1(109.601,55.499) ; R59.2@146.696,59.641 147.171,60.116 RLY.1@147.171,61.468 ; R53.2@146.823,67.564 147.171,67.216 Q6.3@147.171,64.34 RLY.1@147.171,61.468 ; 25.621,59.641 cw(c25.621,60.486) 25.024,59.888 ccw(c25.621,60.486) 25.621,59.641 ; 25.621,59.641 ccw(c25.621,58.796) 25.024,59.393 cw(c25.621,58.796) 25.621,59.641 ; 147.171,60.382 cw(c148.257,60.382) 147.489,61.15 ccw(c148.257,60.382) 147.171,60.382 ; 147.171,60.382 ccw(c146.085,60.382) 146.853,61.15 cw(c146.085,60.382) 147.171,60.382 ; RLY.1@147.171,61.468 cw(c145.301,61.468) 146.476,60.013 ccw(c145.301,61.468) RLY.1@147.171,61.468 ; 147.171,62.554 cw(c146.085,62.554) 146.853,61.786 ccw(c146.085,62.554) 147.171,62.554 ; 147.171,62.554 ccw(c148.257,62.554) 147.489,61.786 cw(c148.257,62.554) 147.171,62.554 ; 44.281,64.643 ccw(c44.281,65.092) 44.598,64.774 cw(c44.281,65.092) 44.281,64.643 ; R60.2@59.542,59.191 cw(c59.542,58.105) 60.31,58.873 ccw(c59.542,58.105) R60.2@59.542,59.191 ; R60.2@59.892,59.541 ccw(c60.495,59.541) 60.069,59.114 cw(c60.495,59.541) R60.2@59.892,59.541 ; R52.2@107.58,59.191 cw(c107.58,58.105) 108.348,58.873 ccw(c107.58,58.105) R52.2@107.58,59.191 ; R52.2@107.93,59.541 ccw(c108.534,59.541) 108.107,59.114 cw(c108.534,59.541) R52.2@107.93,59.541 ; R53.2@146.576,67.217 cw(c145.138,65.779) 147.171,65.779 ccw(c145.138,65.779) R53.2@146.576,67.217 ; R59.2@146.79,59.624 ccw(c146.146,60.421) 147.171,60.421 cw(c146.146,60.421) R59.2@146.79,59.624
  Bottom Layer w0.5: v1(44.704,64.668) 44.933,64.668 54.483,55.118 v1(61.849,55.118) 78.613,55.118 78.994,55.499 v1(109.601,55.499) 117.348,55.499 119.38,57.531 143.234,57.531 RLY.1@147.171,61.468 ; 146.403,60.7 cw(c147.171,59.932) 147.171,61.018 ccw(c147.171,59.932) 146.403,60.7 ; 146.403,60.7 ccw(c145.635,61.468) 146.721,61.468 cw(c145.635,61.468) 146.403,60.7 ; v1@44.704,64.518 cw(c44.704,63.604) 45.35,64.251 ccw(c44.704,63.604) v1@44.704,64.518
NetQ7_1: Q7.1 R59.1 | length 5
  Top Layer w0.5: Q7.1@144.846,57.338 144.846,59.591 R59.1@144.896,59.641 ; R59.1@144.649,59.293 cw(c144.172,58.817) 144.846,58.817 ccw(c144.172,58.817) R59.1@144.649,59.293 ; 144.846,58.575 cw(c145.862,58.575) 145.144,59.293 ccw(c145.862,58.575) 144.846,58.575
NetQ8_1: Q8.1 R60.1 | length 4.6
  Top Layer w0.5: R60.1@57.742,59.641 57.895,59.488 Q8.1@57.895,57.338 Q8.1@57.895,57.289 ; R60.1@57.494,59.293 cw(c56.527,58.326) 57.895,58.326 ccw(c56.527,58.326) R60.1@57.494,59.293
NetQ10_1: Q10.1 R46.2 | length 5.3
  Top Layer w0.5: Q10.1@56.137,202.963 56.137,200.407 R46.2@56.187,200.357 ; R46.2@55.939,200.704 ccw(c55.463,201.181) 56.137,201.181 cw(c55.463,201.181) R46.2@55.939,200.704 ; 56.137,201.423 ccw(c57.153,201.423) 56.434,200.704 cw(c57.153,201.423) 56.137,201.423
NetQ10_3: Q10.3 U10.16 | length 7.1
  Top Layer w0.6: U10.16@57.005,208.503 57.087,208.421 Q10.3@57.087,204.863 ; U10.16@56.687,208.185 cw(c55.721,207.219) 57.087,207.219 ccw(c55.721,207.219) U10.16@56.687,208.185 ; 57.087,207.615 cw(c57.893,207.615) 57.323,208.185 ccw(c57.893,207.615) 57.087,207.615
NetR4_2: R4.2 U2.42 | length 6.9
  Top Layer w0.201: R4.2@99.176,150.292 R4.2@99.176,150.444
  Top Layer w0.3: U2.42@95.834,150.282 99.166,150.282 R4.2@99.176,150.292 ; 97.94,150.282 ccw(c97.94,151.581) 98.858,150.662 cw(c97.94,151.581) 97.94,150.282 ; 98.24,150.282 cw(c98.24,149.408) 98.858,150.026 ccw(c98.24,149.408) 98.24,150.282
NetR5_1: R5.1 U8.3 | length 66.1
  Top Layer w0.254: R5.1@78.031,141.224 78.031,139.952 v3(78.054,139.929) ; v3@78.031,139.982 cw(c79.173,139.982) 78.365,140.79 ccw(c79.173,139.982) v3@78.031,139.982 ; v3@78.031,139.982 ccw(c76.889,139.982) 77.697,140.79 cw(c76.889,139.982) v3@78.031,139.982 ; 78.031,140.281 ccw(c78.407,140.281) 78.141,140.016 cw(c78.407,140.281) 78.031,140.281
  Bottom Layer w0.254: v3(78.054,139.929) 80.797,137.185 80.797,130.251 88.265,122.784 88.265,112.243 93.859,106.648 93.859,95.853 96.044,93.669 U8.3@96.368,93.669 ; 78.264,139.719 cw(c78.474,139.929) 78.177,139.929 ccw(c78.474,139.929) 78.264,139.719 ; 78.264,139.719 ccw(c78.054,139.509) 78.054,139.806 cw(c78.054,139.509) 78.264,139.719 ; 95.008,94.705 ccw(c96.368,96.065) 96.368,94.142 cw(c96.368,96.065) 95.008,94.705 ; 95.441,94.271 ccw(c96.368,95.198) 96.368,93.888 cw(c96.368,95.198) 95.441,94.271 ; 95.789,93.924 cw(c95.534,93.669) 95.895,93.669 ccw(c95.534,93.669) 95.789,93.924
NetR5_2: R5.2 U2.16 | length 20.6
  Top Layer w0.254: R5.2@79.831,141.224 80.076,141.224 U2.16@84.634,145.782 ; R5.2@79.831,141.543 ccw(c79.831,142.904) 80.794,141.942 cw(c79.831,142.904) R5.2@79.831,141.543 ; R5.2@79.831,141.797 ccw(c79.831,143.772) 81.227,142.375 cw(c79.831,143.772) R5.2@79.831,141.797 ; R5.2@80.304,141.324 cw(c80.613,141.324) 80.395,141.543 ccw(c80.613,141.324) R5.2@80.304,141.324 ; 83.058,144.206 ccw(c81.483,145.782) 83.711,145.782 cw(c81.483,145.782) 83.058,144.206 ; 83.492,144.64 ccw(c82.35,145.782) 83.965,145.782 cw(c82.35,145.782) 83.492,144.64 ; 83.926,145.074 ccw(c83.217,145.782) 84.219,145.782 cw(c83.217,145.782) 83.926,145.074 ; 84.359,145.507 ccw(c84.084,145.782) 84.473,145.782 cw(c84.084,145.782) 84.359,145.507
NetR6_1: R6.1 U2.51 | length 8.8
  Top Layer w0.254: U2.51@92.984,155.132 92.984,158.908 R6.1@93.08,159.004 ; R6.1@92.746,158.57 cw(c92.17,157.994) 92.984,157.994 ccw(c92.17,157.994) R6.1@92.746,158.57 ; 92.984,157.53 cw(c94.454,157.53) 93.414,158.57 ccw(c94.454,157.53) 92.984,157.53 ; 92.984,158.143 cw(c93.841,158.143) 93.235,158.749 ccw(c93.841,158.143) 92.984,158.143
NetR7_2: R7.2 U2.29 | length 10.5
  Top Layer w0.254: U2.29@92.484,143.932 92.484,138.173 93.179,137.478 ; R7.2@94.16,137.478 93.179,137.478 ; 93.179,137.478 cw(c93.179,136.698) 93.79,137.184 ccw(c93.179,136.698) 93.179,137.478 ; 93.179,137.478 ccw(c93.179,138.258) 93.79,137.772 cw(c93.179,138.258) 93.179,137.478
NetR8_1: R8.1 U3.2 | length 5.1
  Top Layer w0.6: R8.1@15.199,178.996 U3.2@18.065,178.996 ; R8.1@15.4,178.795 cw(c15.886,178.309) 15.886,178.996 ccw(c15.886,178.309) R8.1@15.4,178.795 ; R8.1@15.4,179.219 ccw(c15.939,179.757) 15.939,178.996 cw(c15.939,179.757) R8.1@15.4,179.219
NetR9_2: R9.2 R12.1 U3.4 | length 11
  Top Layer w0.6: R9.2@15.251,174.244 R12.1@15.251,176.276 15.431,176.456 U3.4@18.065,176.456 ; 15.251,175.068 cw(c14.527,175.068) 15.039,174.556 ccw(c14.527,175.068) 15.251,175.068 ; 15.251,175.068 ccw(c15.975,175.068) 15.463,174.556 cw(c15.975,175.068) 15.251,175.068 ; 15.251,175.452 cw(c15.975,175.452) 15.463,175.964 ccw(c15.975,175.452) 15.251,175.452 ; 15.251,175.452 ccw(c14.527,175.452) 15.039,175.964 cw(c14.527,175.452) 15.251,175.452 ; R12.1@15.463,176.164 cw(c16.169,175.458) 16.169,176.456 ccw(c16.169,175.458) R12.1@15.463,176.164
NetR11_2: R11.2 U3.6 | length 7.4
  Top Layer w0.6: U3.6@23.465,177.708 24.857,177.708 25.019,177.546 25.019,174.256 R11.2@25.221,174.054 ; 25.019,175.366 ccw(c26.433,175.366) 25.433,174.366 cw(c26.433,175.366) 25.019,175.366
NetR27_1: R27.1 U6.1 U6.2 | length 9.9
  Top Layer w0.254: U6.1@31.85,144.589 R27.1@35.231,144.589 ; 33.288,144.589 cw(c33.288,145.127) 32.908,144.747 ccw(c33.288,145.127) 33.288,144.589 ; 33.288,144.589 ccw(c33.288,144.051) 32.908,144.431 cw(c33.288,144.051) 33.288,144.589 ; 34.089,144.589 cw(c34.089,143.447) 34.897,144.255 ccw(c34.089,143.447) 34.089,144.589 ; 34.089,144.589 ccw(c34.089,145.731) 34.897,144.924 cw(c34.089,145.731) 34.089,144.589
  Top Layer w0.5: U6.1@31.85,144.589 U6.2@31.85,145.859
NetR28_1: R28.1 U6.3 | length 5.6
  Top Layer w0.5: U6.3@31.85,147.129 34.977,147.129 R28.1@35.231,146.875 ; 34.014,147.129 cw(c34.014,145.758) 34.983,146.728 ccw(c34.014,145.758) 34.014,147.129
NetR30_2: R30.2 R33.1 U6.6 | length 13.1
  Top Layer w0.254: R30.2@23.506,146.875 R30.2@23.76,147.129
  Top Layer w0.5: R33.1@23.506,144.78 R30.2@23.506,146.875 ; R30.2@23.76,147.129 U6.6@26.95,147.129 ; 23.506,145.725 cw(c22.661,145.725) 23.258,145.127 ccw(c22.661,145.725) 23.506,145.725 ; 23.506,145.725 ccw(c24.351,145.725) 23.753,145.127 cw(c24.351,145.725) 23.506,145.725 ; 23.506,145.931 cw(c24.351,145.931) 23.754,146.528 ccw(c24.351,145.931) 23.506,145.931 ; 23.506,145.931 ccw(c22.661,145.931) 23.259,146.528 cw(c22.661,145.931) 23.506,145.931 ; R30.2@23.754,146.728 cw(c24.722,145.76) 24.722,147.129 ccw(c24.722,145.76) R30.2@23.754,146.728
NetR31_2: R31.2 U6.5 | length 9.5
  Top Layer w0.5: R31.2@23.506,148.971 24.078,148.399 U6.5@26.95,148.399 ; R31.2@23.4,148.765 ccw(c24.283,149.648) 24.283,148.399 cw(c24.283,149.648) R31.2@23.4,148.765 ; R31.2@23.754,149.118 ccw(c25.49,150.855) 25.49,148.399 cw(c25.49,150.855) R31.2@23.754,149.118
NetR32_1: R32.1 U6.7 | length 15.3
  Top Layer w0.254: v1(34.036,149.161) R32.1@35.231,149.161 ; v1@34.089,149.161 cw(c34.089,148.019) 34.897,148.827 ccw(c34.089,148.019) v1@34.089,149.161 ; v1@34.089,149.161 ccw(c34.089,150.303) 34.897,149.496 cw(c34.089,150.303) v1@34.089,149.161 ; R32.1@34.695,149.161 cw(c34.695,149.82) 34.229,149.354 ccw(c34.695,149.82) R32.1@34.695,149.161 ; R32.1@34.695,149.161 ccw(c34.695,148.502) 34.229,148.968 cw(c34.695,148.502) R32.1@34.695,149.161
  Top Layer w0.5: U6.7@26.95,145.859 v1(28.766,145.859)
  Bottom Layer w0.5: v1(28.766,145.859) 32.068,149.161 v1(34.036,149.161)
NetR36_1: R36.1 U2.4 | length 80
  Top Layer w0.254: v3(82.69,170.282) 82.69,152.341 83.249,151.782 U2.4@84.634,151.782 ; v1(113.462,162.966) 113.487,162.966 114.986,161.468 116.713,161.468 121.437,156.743 R36.1@127.345,156.743 ; 82.69,169.985 cw(c82.987,169.985) 82.777,170.195 ccw(c82.987,169.985) 82.69,169.985 ; 82.69,169.985 ccw(c82.393,169.985) 82.603,170.195 cw(c82.393,169.985) 82.69,169.985 ; 126.203,156.743 cw(c126.203,155.601) 127.01,156.409 ccw(c126.203,155.601) 126.203,156.743 ; 126.203,156.743 ccw(c126.203,157.885) 127.01,157.078 cw(c126.203,157.885) 126.203,156.743 ; v1@113.462,162.693 cw(c113.462,161.973) 113.971,162.482 ccw(c113.462,161.973) v1@113.462,162.693 ; v1@113.735,162.966 ccw(c114.333,162.966) 113.91,162.544 cw(c114.333,162.966) v1@113.735,162.966
  Bottom Layer w0.254: v3(82.69,170.282) 90.005,162.966 v1(113.462,162.966) ; 82.9,170.072 cw(c83.11,170.282) 82.813,170.282 ccw(c83.11,170.282) 82.9,170.072 ; 82.9,170.072 ccw(c82.69,169.862) 82.69,170.159 cw(c82.69,169.862) 82.9,170.072 ; 112.803,162.966 cw(c112.803,162.307) 113.269,162.773 ccw(c112.803,162.307) 112.803,162.966 ; 112.803,162.966 ccw(c112.803,163.625) 113.269,163.159 cw(c112.803,163.625) 112.803,162.966
NetR37_2: R37.2 R38.2 U7.3 U7.5 | length 19.6
  Top Layer w0.5: R38.2@129.145,159.69 129.396,159.438 U7.3@131.855,159.438 133.526,159.438 134.796,158.168 U7.5@136.955,158.168 138.661,158.168 139.04,158.547 140.916,158.547 R37.2@142.533,160.164 ; R38.2@129.392,159.837 ccw(c130.356,160.801) 130.356,159.438 cw(c130.356,160.801) R38.2@129.392,159.837 ; 141.764,159.395 ccw(c140.996,160.164) 142.083,160.164 cw(c140.996,160.164) 141.764,159.395 ; R37.2@142.006,159.637 cw(c142.433,159.21) 142.433,159.814 ccw(c142.433,159.21) R37.2@142.006,159.637
NetR39_1: R39.1 TEMP.1 U2.38 U9.2 | length 49.9
  Top Layer w0.254: U2.38@95.834,148.282 112.522,148.282 ; R39.1@112.46,150.266 112.46,148.344 112.522,148.282 ; U9.2@118.694,150.139 116.837,148.282 112.522,148.282 ; 112.46,149.024 cw(c113.602,149.024) 112.795,149.832 ccw(c113.602,149.024) 112.46,149.024 ; 112.46,149.024 ccw(c111.318,149.024) 112.126,149.832 cw(c111.318,149.024) 112.46,149.024 ; 117.204,148.649 cw(c118.694,147.159) 118.694,149.266 ccw(c118.694,147.159) 117.204,148.649 ; 117.638,149.083 cw(c118.694,148.026) 118.694,149.52 ccw(c118.694,148.026) 117.638,149.083 ; 118.071,149.516 cw(c118.694,148.893) 118.694,149.774 ccw(c118.694,148.893) 118.071,149.516
  Bottom Layer w0.254: U9.2@118.694,150.139 118.694,148.514 TEMP.1@120.396,146.812 ; 118.694,148.739 cw(c119.595,148.739) 118.958,149.376 ccw(c119.595,148.739) 118.694,148.739 ; 118.694,148.739 ccw(c117.794,148.739) 118.43,149.376 cw(c117.794,148.739) 118.694,148.739 ; 119.418,147.79 cw(c118.44,146.812) 119.823,146.812 ccw(c118.44,146.812) 119.418,147.79 ; 119.418,147.79 ccw(c120.396,148.768) 120.396,147.385 cw(c120.396,148.768) 119.418,147.79 ; 119.851,147.357 cw(c119.307,146.812) 120.077,146.812 ccw(c119.307,146.812) 119.851,147.357 ; 119.851,147.357 ccw(c120.396,147.901) 120.396,147.131 cw(c120.396,147.901) 119.851,147.357
NetR40_2: R40.2 U2.50 | length 65.4
  Top Layer w0.254: U2.50@93.484,155.132 93.484,156.552 93.828,156.896 95.555,156.896 96.495,157.836 96.495,187.706 113.513,204.724 R40.2@116.448,204.724 ; 115.306,204.724 cw(c115.306,203.582) 116.114,204.39 ccw(c115.306,203.582) 115.306,204.724 ; 115.306,204.724 ccw(c115.306,205.866) 116.114,205.058 cw(c115.306,205.866) 115.306,204.724
NetR45_1: R45.1 U10.11 | length 14.1
  Top Layer w0.5: R45.1@70.22,204.724 70.22,207.988 U10.11@69.705,208.503 ; U10.11@69.705,208.503 cw(c68.462,207.26) 70.22,207.26 ccw(c68.462,207.26) U10.11@69.705,208.503 ; 70.22,205.669 cw(c69.375,205.669) 69.973,205.071 ccw(c69.375,205.669) 70.22,205.669 ; 70.22,205.669 ccw(c71.065,205.669) 70.468,205.071 cw(c71.065,205.669) 70.22,205.669 ; U10.11@69.351,208.15 cw(c67.255,206.053) 70.22,206.053 ccw(c67.255,206.053) U10.11@69.351,208.15
NetU2_17: U2.17 U8.2 | length 64.2
  Top Layer w0.254: v3(81.598,139.6) 83.075,139.6 U2.17@86.484,143.009 ; 81.895,139.6 cw(c81.895,139.897) 81.685,139.687 ccw(c81.895,139.897) 81.895,139.6 ; 81.895,139.6 ccw(c81.895,139.303) 81.685,139.513 cw(c81.895,139.303) 81.895,139.6
  Bottom Layer w0.254: v3(81.598,139.6) 81.598,130.48 89.078,123 89.078,112.547 94.844,106.782 94.844,96.596 95.771,95.669 U8.2@96.368,95.669 ; 81.598,139.303 cw(c81.895,139.303) 81.685,139.513 ccw(c81.895,139.303) 81.598,139.303 ; 81.598,139.303 ccw(c81.301,139.303) 81.511,139.513 cw(c81.301,139.303) 81.598,139.303 ; 95.142,96.298 ccw(c95.804,96.96) 96.178,96.102 cw(c95.804,96.96) 95.142,96.298 ; 95.405,96.035 ccw(c95.964,96.593) 96.28,95.869 cw(c95.964,96.593) 95.405,96.035 ; 95.668,95.771 ccw(c96.124,96.227) 96.382,95.637 cw(c96.124,96.227) 95.668,95.771
NRST: C9.1 P5.20 P6.2 U2.7 | length 141.1
  Top Layer w0.254: C9.1@77.558,150.368 77.644,150.282 U2.7@84.634,150.282 90.08,150.282 v3(91.055,149.306) ; v3(108.979,129.845) 110.476,128.348 122.528,128.348 126.187,124.689 126.187,104.573 P6.2@128.969,101.791 135.179,108.001 138.721,108.001 P5.20@140.018,109.298 ; 90.845,149.516 cw(c90.635,149.306) 90.932,149.306 ccw(c90.635,149.306) 90.845,149.516 ; 90.845,149.516 ccw(c91.055,149.726) 91.055,149.429 cw(c91.055,149.726) 90.845,149.516 ; 109.189,129.635 cw(c109.399,129.845) 109.102,129.845 ccw(c109.399,129.845) 109.189,129.635 ; 109.189,129.635 ccw(c108.979,129.425) 108.979,129.722 cw(c108.979,129.425) 109.189,129.635 ; 127.649,103.111 cw(c126.33,101.791) 128.196,101.791 ccw(c126.33,101.791) 127.649,103.111 ; 127.649,103.111 ccw(c128.969,104.43) P6.2@128.969,102.564 ; 127.649,103.111 ccw(c128.969,104.43) P6.2@128.969,102.564 ; 128.083,102.677 cw(c127.197,101.791) 128.45,101.791 ccw(c127.197,101.791) 128.083,102.677 ; 128.083,102.677 ccw(c128.969,103.563) P6.2@128.969,102.31 ; 128.083,102.677 ccw(c128.969,103.563) P6.2@128.969,102.31 ; P6.2@128.969,102.31 ccw(c128.969,103.563) 129.855,102.677 ; P6.2@128.969,102.31 ccw(c128.969,103.563) 129.855,102.677 ; P6.2@128.969,102.564 ccw(c128.969,104.43) 130.289,103.111 ; P6.2@128.969,102.564 ccw(c128.969,104.43) 130.289,103.111 ; 129.855,102.677 ccw(c130.741,101.791) 129.488,101.791 cw(c130.741,101.791) 129.855,102.677 ; 130.289,103.111 ccw(c131.608,101.791) 129.742,101.791 cw(c131.608,101.791) 130.289,103.111 ; 138.826,108.106 cw(c140.018,106.915) 140.018,108.6 ccw(c140.018,106.915) 138.826,108.106 ; 138.826,108.106 ccw(c137.635,109.298) 139.32,109.298 cw(c137.635,109.298) 138.826,108.106 ; 139.26,108.54 cw(c140.018,107.782) 140.018,108.854 ccw(c140.018,107.782) 139.26,108.54 ; 139.26,108.54 ccw(c138.502,109.298) 139.574,109.298 cw(c138.502,109.298) 139.26,108.54 ; C9.1@77.748,150.078 cw(c78.241,149.585) 78.241,150.282 ccw(c78.241,149.585) C9.1@77.748,150.078 ; C9.1@77.928,149.898 cw(c78.855,148.971) 78.855,150.282 ccw(c78.855,148.971) C9.1@77.928,149.898 ; C9.1@77.928,150.638 ccw(c78.787,151.497) 78.787,150.282 cw(c78.787,151.497) C9.1@77.928,150.638
  Bottom Layer w0.254: v3(91.055,149.306) 91.055,145.168 91.774,144.45 94.672,144.45 95.327,145.105 99.853,145.105 108.979,135.978 v3(108.979,129.845) ; 91.055,149.009 cw(c91.352,149.009) 91.142,149.219 ccw(c91.352,149.009) 91.055,149.009 ; 91.055,149.009 ccw(c90.758,149.009) 90.968,149.219 cw(c90.758,149.009) 91.055,149.009 ; 108.979,130.142 cw(c108.682,130.142) 108.892,129.932 ccw(c108.682,130.142) 108.979,130.142 ; 108.979,130.142 ccw(c109.276,130.142) 109.066,129.932 cw(c109.276,130.142) 108.979,130.142
P1+: C27.2 P1.1 R17.1 R20.1 R23.2 | length 74.6
  Top Layer w0.254: R23.2@40.906,59.944 40.906,57.911 40.906,57.736 R17.1@40.906,55.577 40.956,56.668 ; C27.2@40.956,57.736 40.956,56.668 ; 40.906,56.819 cw(c39.764,56.819) 40.571,56.011 ccw(c39.764,56.819) 40.906,56.819 ; 40.906,56.819 ccw(c42.048,56.819) 41.24,56.011 cw(c42.048,56.819) 40.906,56.819 ; 40.906,58.702 cw(c42.048,58.702) 41.24,59.509 ccw(c42.048,58.702) 40.906,58.702 ; 40.906,58.702 ccw(c39.764,58.702) 40.571,59.509 cw(c39.764,58.702) 40.906,58.702 ; 40.956,56.668 cw(c41.333,56.668) 41.175,57.011 ccw(c41.333,56.668) 40.956,56.668 ; 40.956,56.668 ccw(c40.578,56.668) 40.737,57.011 cw(c40.578,56.668) 40.956,56.668 ; 40.958,56.718 cw(c40.055,56.759) 40.614,56.049 ccw(c40.055,56.759) 40.958,56.718 ; 40.958,56.718 ccw(c41.878,56.676) 41.236,56.016 cw(c41.878,56.676) 40.958,56.718 ; C27.2@40.586,57.116 cw(c39.814,56.344) 40.906,56.344 ccw(c39.814,56.344) C27.2@40.586,57.116 ; C27.2@40.586,58.356 ccw(c39.814,59.128) 40.906,59.128 cw(c39.814,59.128) C27.2@40.586,58.356 ; R17.1@40.906,56.103 cw(c42.339,56.103) 41.326,57.116 ccw(c42.339,56.103) R17.1@40.906,56.103 ; 40.906,56.716 cw(c41.726,56.716) 41.146,57.296 ccw(c41.726,56.716) 40.906,56.716 ; 40.906,58.756 ccw(c41.726,58.756) 41.146,58.176 cw(c41.726,58.756) 40.906,58.756 ; R23.2@40.906,59.369 ccw(c42.339,59.369) 41.326,58.356 cw(c42.339,59.369) R23.2@40.906,59.369
  Top Layer w0.5: P1.1@36.068,50.8 40.845,55.577 R17.1@40.906,55.577 ; R17.1@40.818,55.577 40.818,57.736 40.818,59.856 R23.2@40.906,59.944 40.906,61.821 R20.1@40.934,61.849 ; 36.836,51.568 cw(c36.068,52.336) 36.068,51.25 ccw(c36.068,52.336) 36.836,51.568 ; 36.836,51.568 ccw(c37.604,50.8) 36.518,50.8 cw(c37.604,50.8) 36.836,51.568 ; 40.906,60.889 cw(c40.061,60.889) 40.658,60.291 ccw(c40.061,60.889) 40.906,60.889 ; 40.906,60.889 ccw(c41.751,60.889) 41.153,60.291 cw(c41.751,60.889) 40.906,60.889 ; 40.034,54.766 cw(c40.906,53.893) 40.906,55.127 ccw(c40.906,53.893) 40.034,54.766 ; R17.1@40.658,55.924 ccw(c40.273,56.309) 40.818,56.309 cw(c40.273,56.309) R17.1@40.658,55.924 ; R23.2@40.658,59.596 cw(c40.273,59.211) 40.818,59.211 ccw(c40.273,59.211) R23.2@40.658,59.596 ; R20.1@40.686,61.502 cw(c40.157,60.972) 40.906,60.972 ccw(c40.157,60.972) R20.1@40.686,61.502 ; R17.1@40.818,56.187 cw(c42.255,56.187) 41.239,57.203 ccw(c42.255,56.187) R17.1@40.818,56.187 ; 40.818,56.734 ccw(c41.963,56.734) 41.153,55.924 cw(c41.963,56.734) 40.818,56.734 ; 40.818,58.787 cw(c41.963,58.787) 41.153,59.596 ccw(c41.963,58.787) 40.818,58.787 ; R23.2@40.818,59.285 ccw(c42.255,59.285) 41.239,58.269 cw(c42.255,59.285) R23.2@40.818,59.285 ; 40.906,60.836 cw(c41.846,60.836) 41.181,61.502 ccw(c41.846,60.836) 40.906,60.836
  Bottom Layer w0.5: P1.1@36.068,45.72 P1.1@36.068,50.8 ; 36.068,46.806 cw(c34.982,46.806) 35.75,46.038 ccw(c34.982,46.806) 36.068,46.806 ; 36.068,46.806 ccw(c37.154,46.806) 36.386,46.038 cw(c37.154,46.806) 36.068,46.806 ; 36.068,49.714 cw(c37.154,49.714) 36.386,50.482 ccw(c37.154,49.714) 36.068,49.714 ; 36.068,49.714 ccw(c34.982,49.714) 35.75,50.482 cw(c34.982,49.714) 36.068,49.714
P1-: P1.2 R17.2 Y5.1 | length 162.7
  Top Layer w0.5: P1.2@38.862,50.8 42.706,54.644 ; R17.2@42.706,55.577 42.706,54.644 ; 42.706,54.644 cw(c43.522,54.644) 42.951,55.227 ccw(c43.522,54.644) 42.706,54.644 ; 42.706,54.644 ccw(c41.889,54.644) 42.461,55.227 cw(c41.889,54.644) 42.706,54.644 ; P1.2@38.608,51.25 ccw(c38.608,52.95) 39.81,51.748 cw(c38.608,52.95) P1.2@38.608,51.25 ; 41.519,53.457 ccw(c39.5,55.477) 42.356,55.477 cw(c39.5,55.477) 41.519,53.457 ; 42.373,54.311 ccw(c41.207,55.477) 42.856,55.477 cw(c41.207,55.477) 42.373,54.311
  Bottom Layer w0.254: P1.2@38.608,50.8 39.04,51.232 39.04,109.957 41.834,112.751 41.834,140.31 57.483,155.958 Y5.1@57.483,156.096 ; P1.2@38.203,51.205 ccw(c36.182,53.226) 39.04,53.226 cw(c36.182,53.226) P1.2@38.203,51.205 ; P1.2@38.382,51.026 ccw(c36.795,52.613) 39.04,52.613 cw(c36.795,52.613) P1.2@38.382,51.026 ; P1.2@38.562,50.846 ccw(c37.409,51.999) 39.04,51.999 cw(c37.409,51.999) P1.2@38.562,50.846 ; P1.2@38.742,50.666 ccw(c38.022,51.386) 39.04,51.386 cw(c38.022,51.386) P1.2@38.742,50.666 ; 56.301,154.777 ccw(c54.982,156.096) 56.848,156.096 cw(c54.982,156.096) 56.301,154.777 ; 56.634,155.11 cw(c57.483,154.261) 57.483,155.461 ccw(c57.483,154.261) 56.634,155.11 ; 56.735,155.211 ccw(c55.849,156.096) 57.102,156.096 cw(c55.849,156.096) 56.735,155.211
  Bottom Layer w0.5: P1.2@38.608,45.72 P1.2@38.608,50.8 ; 38.608,46.806 cw(c37.522,46.806) 38.29,46.038 ccw(c37.522,46.806) 38.608,46.806 ; 38.608,46.806 ccw(c39.694,46.806) 38.926,46.038 cw(c39.694,46.806) 38.608,46.806 ; 38.608,49.714 cw(c39.694,49.714) 38.926,50.482 ccw(c39.694,49.714) 38.608,49.714 ; 38.608,49.714 ccw(c37.522,49.714) 38.29,50.482 cw(c37.522,49.714) 38.608,49.714
P2+: C28.2 P2.1 R18.1 R21.1 R24.2 | length 59
  Top Layer w0.254: R18.1@84.162,55.45 84.162,56.491 ; C28.2@84.212,57.609 84.212,56.541 ; 84.162,56.491 cw(c83.462,56.491) 83.88,55.929 ccw(c83.462,56.491) 84.162,56.491 ; 84.162,56.491 ccw(c84.862,56.491) 84.444,55.929 cw(c84.862,56.491) 84.162,56.491 ; 84.162,56.491 84.19,56.519 84.212,56.541 ; 84.212,56.541 cw(c84.59,56.541) 84.431,56.884 ccw(c84.59,56.541) 84.212,56.541 ; 84.212,56.541 ccw(c83.835,56.541) 83.993,56.884 cw(c83.835,56.541) 84.212,56.541
  Top Layer w0.5: R21.1@82.434,55.45 R18.1@84.162,55.45 ; P2.1@83.82,45.72 P2.1@83.82,50.8 84.19,51.17 84.19,55.45 84.19,56.519 ; R24.2@84.19,59.817 84.19,57.609 84.19,56.519 ; 83.279,55.45 cw(c83.279,56.295) 82.681,55.697 ccw(c83.279,56.295) 83.279,55.45 ; 83.279,55.45 ccw(c83.279,54.605) 82.681,55.202 cw(c83.279,54.605) 83.279,55.45 ; 83.317,55.45 cw(c83.317,54.605) 83.914,55.202 ccw(c83.317,54.605) 83.317,55.45 ; 83.317,55.45 ccw(c83.317,56.295) 83.914,55.697 cw(c83.317,56.295) 83.317,55.45 ; 83.82,46.806 cw(c82.734,46.806) 83.502,46.038 ccw(c82.734,46.806) 83.82,46.806 ; 83.82,46.806 ccw(c84.906,46.806) 84.138,46.038 cw(c84.906,46.806) 83.82,46.806 ; 83.82,49.714 cw(c84.906,49.714) 84.138,50.482 ccw(c84.906,49.714) 83.82,49.714 ; 83.82,49.714 ccw(c82.734,49.714) 83.502,50.482 cw(c82.734,49.714) 83.82,49.714 ; C28.2@83.947,57.06 cw(c83.468,56.519) 84.19,56.519 ; C28.2@83.947,57.06 cw(c83.468,56.519) 84.19,56.519 ; C28.2@83.947,57.06 cw(c83.468,56.519) 84.19,56.519 ; C28.2@83.947,57.06 cw(c83.468,56.519) 84.19,56.519 ; 84.19,56.519 cw(c84.837,56.519) C28.2@84.451,57.038 ; 84.19,56.519 cw(c84.837,56.519) C28.2@84.451,57.038 ; 84.19,56.519 cw(c84.837,56.519) C28.2@84.451,57.038 ; 84.19,56.519 cw(c84.837,56.519) C28.2@84.451,57.038 ; 84.19,58.872 cw(c85.035,58.872) 84.437,59.47 ccw(c85.035,58.872) 84.19,58.872 ; 84.19,58.872 ccw(c83.345,58.872) 83.942,59.47 cw(c83.345,58.872) 84.19,58.872 ; P2.1@83.502,51.118 ccw(c81.84,52.78) 84.19,52.78 cw(c81.84,52.78) P2.1@83.502,51.118 ; P2.1@83.855,50.765 ccw(c83.048,51.572) 84.19,51.572 cw(c83.048,51.572) P2.1@83.855,50.765 ; R18.1@83.914,55.102 cw(c83.249,54.437) 84.19,54.437 ccw(c83.249,54.437) R18.1@83.914,55.102 ; R18.1@83.914,55.797 ccw(c83.249,56.463) 84.19,56.463 cw(c83.249,56.463) R18.1@83.914,55.797 ; C28.2@83.929,57.076 cw(c83.3,56.447) 84.19,56.447 ccw(c83.3,56.447) C28.2@83.929,57.076 ; C28.2@83.929,58.142 ccw(c83.3,58.771) 84.19,58.771 cw(c83.3,58.771) C28.2@83.929,58.142 ; 84.19,54.573 cw(c84.939,54.573) 84.409,55.102 ccw(c84.939,54.573) 84.19,54.573 ; 84.19,56.327 ccw(c84.939,56.327) 84.409,55.797 cw(c84.939,56.327) 84.19,56.327 ; 84.19,56.34 cw(c85.231,56.34) 84.495,57.076 ccw(c85.231,56.34) 84.19,56.34 ; 84.19,58.878 ccw(c85.231,58.878) 84.495,58.142 cw(c85.231,58.878) 84.19,58.878